# EAGLE board carret (EAGLE 5.06)
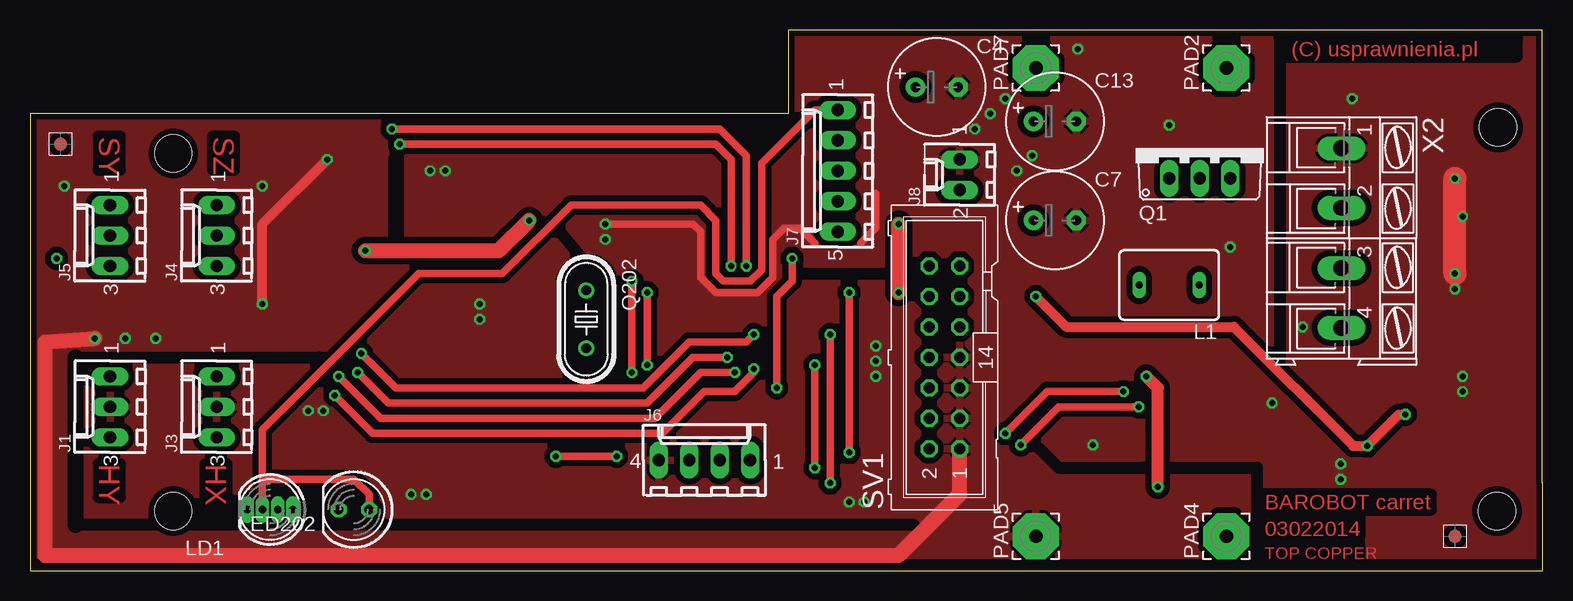
[diagram p0: board, top side]
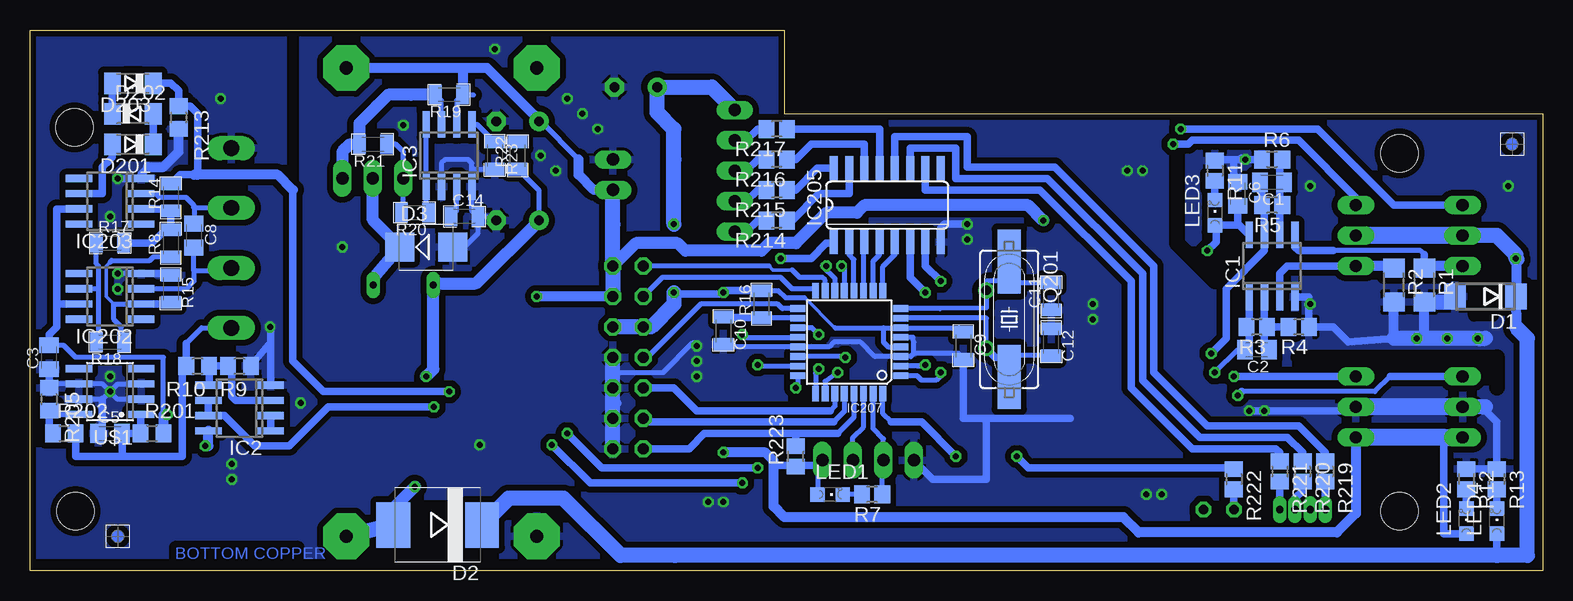
[diagram p1: board, bottom side, seen from below]

Size 126.05 x 45.09 mm. Coordinates in mm from the lower left corner, seen from the top.
Outline: 0,0 126.05,0 126.05,7.3 126.03,7.3 126.03,45.08 63.18,45.09 63.18,38.09 0,38.09 0,0
Copper layers (1*16): Top 0.035mm / dielectric 1.5mm / Bottom 0.035mm
Design rules "default *": minimum track width 10mil, minimum drill 0.5mm, track to track 10mil, track to pad 10mil, pad to pad 8mil, via to via 10mil, smd to smd 8mil, copper to edge 20mil, drill to drill 8mil, minimum pad ring 10mil, minimum via ring 8mil, stop-mask expansion 4mil, vias tented up to drill 0mil, thermal gap 10mil
Holes 3.1 mm at 122.33,36.95 122.25,4.95 11.94,4.95 11.94,34.8
tRestrict: 18 lines
bRestrict: area 4.1,21.3 to 5.7,24.1; area 90.8,2.2 to 93.3,5.4; area 116.8,34.6 to 118.1,41.6; 5 lines

## Footprints (pad centres in the part's own frame; a part is rotated, then mirrored left to right if it is on the bottom)
C0805K = smd 1.3 x 1.6: 1 -1,0; 2 1,0
E3,5-8 = drill 0.813 pad 1.6 round: + -1.778,0 | drill 0.813 pad 1.6 octagon: - 1.778,0
0805 = smd 1.044 x 1.6: 1 -1.127,0; 2 1.127,0
DO214AA = smd 1.8 x 2.2: A 2.55,0; C -2.55,0
SMC = smd 2.8 x 3.8: A 3.7,0; C -3.7,0
SMB = smd 2.4 x 2.4: A 2.2,0; C -2.2,0
SOD80C = smd 1.4 x 1.8: A 1.7,0; C -1.7,0
SO08 = smd 0.6 x 2.2: 1 -1.905,-2.6; 2 -0.635,-2.6; 3 0.635,-2.6; 4 1.905,-2.6; 5 1.905,2.6; 6 0.635,2.6; 7 -0.635,2.6; 8 -1.905,2.6
SOIC8 = smd 0.6 x 2.2: 1 -1.905,-2.6; 2 -0.635,-2.6; 3 0.635,-2.6; 4 1.905,-2.6; 5 1.905,2.6; 6 0.635,2.6; 7 -0.635,2.6; 8 -1.905,2.6
SO16 = smd 0.66 x 2.032: 1 -4.445,-3.073; 2 -3.175,-3.073; 3 -1.905,-3.073; 4 -0.635,-3.073; 5 0.635,-3.073; 6 1.905,-3.073; 7 3.175,-3.073; 8 4.445,-3.073; 9 4.445,3.073; 10 3.175,3.073; 11 1.905,3.073; 12 0.635,3.073; 13 -0.635,3.073; 14 -1.905,3.073; 15 -3.175,3.073; 16 -4.445,3.073
TQFP32-08 = smd 1.27 x 0.559: 1 -4.293,2.8; 2 -4.293,2; 3 -4.293,1.2; 4 -4.293,0.4; 5 -4.293,-0.4; 6 -4.293,-1.2; 7 -4.293,-2; 8 -4.293,-2.8; 17 4.293,-2.8; 18 4.293,-2; 19 4.293,-1.2; 20 4.293,-0.4; 21 4.293,0.4; 22 4.293,1.2; 23 4.293,2; 24 4.293,2.8 | smd 0.559 x 1.27: 9 -2.8,-4.293; 10 -2,-4.293; 11 -1.2,-4.293; 12 -0.4,-4.293; 13 0.4,-4.293; 14 1.2,-4.293; 15 2,-4.293; 16 2.8,-4.293; 25 2.8,4.293; 26 2,4.293; 27 1.2,4.293; 28 0.4,4.293; 29 -0.4,4.293; 30 -1.2,4.293; 31 -2,4.293; 32 -2.8,4.293
6410-03 = drill 1.016 long: 1 2.54,0; 2 0,0; 3 -2.54,0
6410-04 = drill 1.016 long: 1 3.81,0; 2 1.27,0; 3 -1.27,0; 4 -3.81,0
6410-05 = drill 1.016 long: 1 5.08,0; 2 2.54,0; 3 0,0; 4 -2.54,0; 5 -5.08,0
6410-02 = drill 1.016 long: 1 1.27,0; 2 -1.27,0
BS75 = drill 0.6 long: 1 -2.5,0; 2 2.5,0
LED-5-RGB = drill 0.6 pad 1.016 long: 1 1.905,0; 2 0.635,0; 3 -0.635,0; 4 -1.905,0
CHIPLED_0805 = smd 1.2 x 1.2: A 0,-1.05; C 0,1.05
LED5MM = drill 0.813 octagon: A -1.27,0; K 1.27,0
3,81/1,1 = drill 1.118 pad 3.81 octagon: 1 0,0
TO220AV = drill 1.016 long: B -2.54,-2.54; C 0,-2.54; E 2.54,-2.54
HC49UP = smd 5.334 x 1.93: 1 -4.826,0; 2 4.826,0
HC49U-V = drill 0.813 round: 1 -2.413,0; 2 2.413,0
R1206 = smd 1.6 x 1.803: 1 -1.422,0; 2 1.422,0
R0805 = smd 1.3 x 1.5: 1 -0.85,0; 2 0.85,0
R0805' = smd 1.3 x 1.5: 1 -0.95,0; 2 0.95,0
ML14 = drill 0.914 octagon: 1 -7.62,-1.27; 2 -7.62,1.27; 3 -5.08,-1.27; 4 -5.08,1.27; 5 -2.54,-1.27; 6 -2.54,1.27; 7 0,-1.27; 8 0,1.27; 9 2.54,-1.27; 10 2.54,1.27; 11 5.08,-1.27; 12 5.08,1.27; 13 7.62,-1.27; 14 7.62,1.27
AK300/4 = drill 1.321 long: 1 -7.493,0; 2 -2.515,0; 3 2.515,0; 4 7.493,0

## Placement (x,y rotation side)
C1  100n  [C0805K]  22.54,32.38 180 bottom
C2  100n  [C0805K]  23.81,18.41 180 bottom
C3  100n  [C0805K]  124.46,17.78 90 bottom
C4  100u/6V  [E3,5-8]  75.56,40.32 0 top
C5  100n  [C0805K]  119.38,11.43 0 bottom
C6  100n  [C0805K]  25.4,31.43 270 bottom
C7  [E3,5-8]  85.41,29.21 0 top
C8  100n  [C0805K]  112.39,27.94 270 bottom
C9  100n  [0805]  48.26,18.73 270 bottom
C10  100n  [0805]  68.26,20 270 bottom
C11  22p  [0805]  40.96,22.86 90 bottom
C12  22p  [0805]  40.96,19.05 270 bottom
C13  [E3,5-8]  85.41,37.47 0 top
C14  [0805]  89.85,29.53 0 bottom
D1  SS20  [DO214AA]  4.76,22.86 180 bottom
D2  SK36  [SMC]  92.08,3.81 180 bottom
D3  [SMB]  93.03,26.99 0 bottom
D201  1N4148  [SOD80C]  117.47,35.56 180 bottom
D202  1N4148  [SOD80C]  117.47,38.1 0 bottom
D203  1N4148  [SOD80C]  117.47,40.64 180 bottom
IC1  LM358D  [SO08]  22.54,25.4 0 bottom
IC2  LM358D  [SO08]  108.58,13.56 90 bottom
IC3  MC34063AD  [SOIC8]  91.12,34.61 0 bottom
IC202  OP07  [SO08]  119.38,22.86 90 bottom
IC203  OP07  [SO08]  119.38,30.8 90 bottom
IC205  ULN2003  [SO16]  54.61,30.48 0 bottom
IC207  ATMEGA328  [TQFP32-08]  57.78,19.05 180 bottom
J1  WF03-S  [6410-03]  6.67,13.65 90 top
J3  WF03-S  [6410-03]  15.56,13.65 90 top
J4  WF03-S  [6410-03]  15.56,27.94 90 top
J5  WF03-S  [6410-03]  6.67,27.94 90 top
J6  WF04-S  [6410-04]  56.2,9.21 0 top
J7  22-27-2051-05  [6410-05]  67.31,33.34 90 top
J8  WF02-S  [6410-02]  77.47,33.02 90 top
L1  [BS75]  94.93,23.81 180 top
LD1  LRD RGB CA  [LED-5-RGB]  20,5.08 180 top
LED1  LED YEL  [CHIPLED_0805]  59.37,6.35 270 bottom
LED2  LED GRN  [CHIPLED_0805]  6.35,4.13 0 bottom
LED3  LED GRN  [CHIPLED_0805]  27.3,29.84 0 bottom
LED4  LED GRN  [CHIPLED_0805]  3.81,4.13 0 bottom
LED202  LED WHT  [LED5MM]  26.99,5.08 180 top
PAD2  [3,81/1,1]  99.69,41.91 90 top
PAD4  [3,81/1,1]  99.69,2.86 90 top
PAD5  [3,81/1,1]  83.82,2.86 90 top
PAD7  [3,81/1,1]  83.82,41.91 90 top
Q1  TIP42C  [TO220AV]  97.47,35.24 0 top
Q201  16 MHz  [HC49UP]  44.45,20.95 270 bottom
Q202  16 MHz  [HC49U-V]  46.35,20.95 270 top
R1  0R047 1%  [R1206]  9.84,23.81 270 bottom
R2  0R047 1%  [R1206]  12.38,23.81 270 bottom
R3  100k 1%  [R0805]  23.81,20.32 180 bottom
R4  1k 1%  [R0805]  20.32,20.32 180 bottom
R5  100k 1%  [R0805]  22.54,30.48 180 bottom
R6  1k 1%  [R0805]  22.54,34.29 0 bottom
R7  470R  [R0805]  55.88,6.35 180 bottom
R8  8k2  [0805]  114.3,27.3 90 bottom
R9  3k 1%  [R0805']  108.58,17.05 180 bottom
R10  3k 1%  [R0805']  112.08,17.05 180 bottom
R11  470R  [R0805]  27.3,33.34 270 bottom
R12  470R  [R0805]  6.35,7.62 270 bottom
R13  470R  [R0805]  3.81,7.62 270 bottom
R14  330k 1%  [0805]  114.3,31.11 90 bottom
R15  330k 1%  [0805]  114.3,23.5 270 bottom
R16  82R  [0805]  65.09,22.23 90 bottom
R17  1k 1%  [0805]  119.38,27.3 0 bottom
R18  1k 1%  [0805]  119.38,19.05 180 bottom
R19  [0805]  91.12,39.69 180 bottom
R20  [0805]  93.98,29.84 180 bottom
R21  [0805]  97.47,35.56 180 bottom
R22  [0805]  85.41,34.61 90 bottom
R23  [0805]  87.31,34.61 270 bottom
R201  82R  [R0805']  115.89,11.43 0 bottom
R202  3k 1%  [R0805']  123.19,11.43 0 bottom
R205  1k 1%  [R0805']  124.46,14.29 270 bottom
R213  470R  [R0805']  113.67,37.78 270 bottom
R214  TBD  [R0805]  63.82,29.21 180 bottom
R215  TBD  [R0805]  63.82,31.75 180 bottom
R216  TBD  [R0805]  63.82,34.29 180 bottom
R217  TBD  [R0805]  63.82,36.83 180 bottom
R219  TBD  [R0805]  18.1,8.26 270 bottom
R220  TBD  [R0805]  20,8.26 270 bottom
R221  TBD  [R0805]  21.91,8.26 270 bottom
R222  TBD  [R0805]  25.72,7.62 270 bottom
R223  10k  [R0805]  62.23,9.53 90 bottom
SV1  BH14S  [ML14]  76.2,17.78 90 top
U$1  TL431  [SO08]  119.38,14.92 90 bottom
U$2  [FIDUCIAL_G10S]  2.54,35.56 0 top
U$3  [FIDUCIAL_G10S]  2.54,35.56 0 bottom
U$4  [FIDUCIAL_G10S]  118.75,2.86 0 bottom
U$5  [FIDUCIAL_G10S]  118.75,2.86 0 top
X2  [AK300/4]  109.28,27.73 270 top

## Library data of the parts
C1-C8 C13 R9 R10 R201 R202 R205 R213 = rcl
C9-C12 C14 R8 R14-R23 = barobot
D1-D3 D201-D203 = diode
IC1 IC2 IC202 IC203 = linear
IC3 = mc34063
IC205 = uln-udn
IC207 = atmel
J1 J3-J8 = con-molex
L1 = inductor-neosid
LD1 = 0alib2
LED1-LED4 LED202 = led
PAD2 PAD4 PAD5 PAD7 = wirepad
Q1 = transistor-power
Q201 Q202 = crystal
R1-R7 R11-R13 R214-R217 R219-R223 = resistor
SV1 = con-ml
U$1 = 0alib
U$2-U$5 = dicons
X2 = con-ptr500

## Nets
+6V: C7.+ D2.A L1.2 PAD4.1 R22.1
+10V: C5.2 R10.2 R201.1 R202.2 U$1.1 X2.4
+12V: C3.2 C6.2 C13.+ IC1.8 IC2.8 IC3.6 IC202.7 IC203.7 J8.2 LED3.A PAD2.1 R19.1 R201.2 SV1.11 SV1.13
GND: C3.1 C4.- C5.1 C6.1 C7.- C9.2 C10.2 C11.1 C12.1 C13.- C14.2 D1.A D3.A IC1.4 IC2.4 IC3.2 IC3.4 IC202.4 IC203.4 IC205.8 IC207.3 IC207.5 IC207.21 J1.2 J3.2 J6.4 J8.1 PAD5.1 R1.2 R2.2 R4.1 R6.1 R9.1 R11.1 R12.1 R13.1 R15.1 R23.2 R205.1 R213.2 SV1.1 SV1.3 SV1.5 SV1.7 U$1.2 U$1.3 U$1.6 U$1.7 X2.1
N$1: J7.5 R214.2
N$2: J7.4 R215.2
N$3: IC205.16 R215.1
N$4: IC205.15 R214.1
N$5: IC205.14 R216.1
N$6: IC205.10 R221.1
N$7: LD1.1 R219.2
N$8: LD1.3 R220.2
N$9: LD1.4 R221.2
N$10: IC207.29 R223.2 SV1.2
N$11: D1.C D2.C J4.2 J5.2 LED4.A
N$12: IC205.4 IC207.10
N$13: IC205.1 IC207.24
N$14: IC205.2 IC207.12
N$15: IC205.13 R217.1
N$16: IC205.12 R219.1
N$17: IC205.11 R220.1
N$18: IC205.3 IC207.11
N$19: IC205.5 IC207.9
N$20: IC205.6 IC207.2
N$21: IC207.32 R222.1
N$22: IC205.7 IC207.1
N$23: LED202.K R222.2
N$24: IC207.14 J5.1
N$25: IC207.13 J4.1
N$26: IC207.25 J1.1
N$27: C11.2 IC207.8 Q201.1 Q202.1
N$28: IC207.26 J3.1
N$29: IC1.5 J5.3 R1.1
N$30: IC1.3 J4.3 R2.1
N$31: C2.2 IC1.1 IC207.22 R3.2
N$32: J7.3 R216.2
N$33: J7.2 R217.2
N$34: IC207.28 SV1.4
N$35: IC207.15 SV1.14
N$36: LED3.C R11.2
N$37: C1.2 IC1.7 IC207.19 R5.2
N$38: IC207.30 J6.2
N$39: IC207.31 J6.3 R7.1
N$40: LED1.C R7.2
N$41: D203.C IC207.23 R14.2 R213.1
N$42: IC207.16 SV1.12
N$43: R202.1 R205.2 U$1.8
N$44: IC207.17 SV1.8
N$45: IC207.27 SV1.6
N$46: C12.2 IC207.7 Q201.2 Q202.2
N$47: LED4.C R13.2
N$48: C1.1 IC1.6 R5.1 R6.2
N$49: C8.2 IC202.3 X2.3
N$50: C8.1 IC203.3 X2.2
N$51: IC202.2 R8.1 R15.2 R18.1
N$52: IC202.6 R17.1 R18.2
N$53: IC203.2 R8.2 R14.1 R17.2
N$54: D201.A IC203.6
N$55: D201.C D202.A
N$56: D202.C D203.A
N$57: C10.1 IC207.18 R16.1
N$58: IC2.3 IC2.5 R9.2 R10.1
N$59: IC2.6 IC2.7 IC207.20
N$60: IC2.1 IC2.2
N$61: C2.1 IC1.2 R3.1 R4.2
N$63: LED2.C R12.2
N$64: IC3.7 Q1.E R19.2 R21.2
N$65: IC3.1 IC3.8 R20.1
N$66: Q1.B R20.2 R21.1
N$67: C14.1 IC3.3
N$68: IC3.5 R22.2 R23.1
N$71: D3.C L1.1 Q1.C
VCC: C4.+ C9.1 IC207.4 IC207.6 J1.3 J3.3 J6.1 J7.1 LD1.2 LED1.A LED2.A LED202.A R16.2 R223.1 SV1.9 SV1.10

## Tracks (layer width: path | path; a pad name or v marks a point on that pad's centre or on a via)
+6V  (via drill 0.5)
  Top 1.016: v93.03,16.19 93.98,15.24 v93.98,6.99
  Bottom 0.406: L1.2 91.92,23.94 | R22.1 83.63,31.7 C7.+
  Bottom 1.016: 91.92,23.94 88.9,23.94 C7.+ | L1.2 92.43,16.79 v93.03,16.19 | v93.98,6.99 95.78,5.19 D2.A
  Bottom 1.27: D2.A PAD4.1
+10V
  Bottom 0.406: U$1.1 116.84,13.02 | 113.03,18.95 111.74,20.24 X2.4
  Bottom 0.61: 118.11,9.53 113.35,9.53 113.35,16.73 R10.2 113.03,18.95 | R202.2 122.24,9.53 118.11,9.53 | 118.11,9.53 118.38,9.53 C5.2 R201.1 116.84,13.02 U$1.1
+12V  (via drill 0.5)
  Top 0.813: v114.62,13.02 114.08,13.02 v111.44,10.38 110.27,10.38 100.33,20.32 86.36,20.32 v83.82,22.86
  Top 1.27: v41.59,29.21 39.05,26.67 v27.94,26.67
  Bottom 0.406: 114.94,12.06 114.94,17.78 122.24,17.78 123.24,18.78 C3.2 | IC3.6 90.49,39.2 R19.1 89.09,39.69 | 80.33,34.29 83.5,37.47
  Bottom 0.61: IC203.7 123.83,30.16 123.83,22.23 | 123.83,22.23 123.83,20.32 124.46,19.68 C3.2 | 123.83,22.23 IC202.7 | 114.94,12.06 R201.2 | 27.21,28.8 LED3.A 27.21,28.8 | 27.21,28.8 25.4,28.8 25.4,29.21 | 27.21,28.8 27.21,27.4 v27.94,26.67 | 25.4,29.21 25.4,28.95 IC1.8 | 25.4,29.21 C6.2
  Bottom 0.813: 114.94,12.06 114.94,13.02 v114.62,13.02 | v111.44,10.38 111.19,10.38 IC2.8 | SV1.11 v83.82,22.86 | PAD2.1 90.49,41.91 90.17,41.91 | 90.17,41.91 87.95,41.91 83.98,37.94 | 83.5,37.47 83.98,37.94 | 80.33,34.29 80.33,33.02 79.06,31.75 J8.2 | R19.1 90,41.74 90.17,41.91 | C13.+ 83.63,37.59 83.98,37.94
  Bottom 1.016: v41.59,29.21 42.86,30.48 56.52,30.48 57.15,29.84 59.69,29.84 62.23,27.3 64.45,27.3 65.09,26.67 71.44,26.67 72.07,27.3 75.56,27.3 SV1.13
  Bottom 1.27: SV1.11 SV1.13 77.47,28.89 J8.2
GND  (via drill 0.5)
  Top 0.61: 65.41,27.3 64.14,28.57 62.87,28.57 61.91,27.62 61.91,24.45 60.64,23.18 57.15,23.18 55.88,24.45 55.88,28.26 55.24,28.89 v47.94,28.89 | 69.22,27.3 70.48,28.57 70.48,31.43
  Top 0.813: v19.37,22.23 19.37,28.89 v24.77,34.29
  Top 1.27: v5.4,19.37 1.27,19.05 1.27,1.27 72.39,1.27 77.47,6.35 SV1.1
  Top 1.93: v118.75,24.77 v118.75,32.7
  Bottom 0.406: 68.26,18.65 IC207.21 59.45,18.65 59.05,19.05 56.83,19.05 55.63,17.85 IC207.3 52.63,17.85 52.39,18.1 | 68.26,18.65 68.58,18.65 | 52.39,18.1 52.39,19.05 52.47,19.45 IC207.5 | 48.62,18.1 52.39,18.1 | 70.8,19 73.3,16.51 77.47,16.51 | R205.1 124.14,15.56 U$1.6 120.02,15.56 v119.38,14.92 | U$1.7 120.02,14.29 v119.38,14.92 | U$1.2 118.75,14.29 v119.38,14.92 | U$1.3 118.75,15.56 119.22,15.08 | IC202.4 v118.75,24.77 | 68.26,18.65 C10.2 | 89.22,33.66 89.22,33.97 89.53,34.29 91.44,34.29 91.76,33.97 IC3.2 | 89.22,33.66 IC3.4 89.22,30.02 C14.2 | R23.2 89.04,33.48 89.22,33.66 | C14.2 88.08,29.53 C7.- | D3.A 89.85,26.99 88.9,27.94 88.72,28.11 C14.2
  Bottom 0.61: 48.26,12.7 C9.2 | 5.08,13.65 3.81,12.38 R13.1 R12.1 | 12.38,19.37 16.19,19.05 17.46,20.32 R4.1 19.47,22.23 19.47,22.8 IC1.4 | v47.94,28.89 49.85,28.89 50.16,28.57 IC205.8 | 25.08,34.29 25.72,34.29 | v24.77,34.29 R6.1 | 25.72,34.29 25.72,33.02 C6.1 | 25.72,34.29 27.2,34.29 | IC202.4 114.3,24.77 R15.1 | R213.2 113.67,37.15 | 105.73,15.46 IC2.4 105.98,19.05 | C5.1 120.02,11.43 120.02,14.29 | v118.75,32.7 IC203.4 | IC203.4 116.2,32.7 | R205.1 C3.1 | v119.38,14.92 119.22,15.08 | 105.98,19.05 R9.1 | 105.98,19.05 105.98,20.26 v106.05,20.32 | 39.37,12.7 48.26,12.7 | 48.26,12.7 46.35,12.7 46.35,7.62 50.8,7.62 J6.4 | v24.45,13.34 15.88,13.34 J3.2 | 116.2,33.66 116.78,33.08 IC203.4
  Bottom 0.813: 12.38,19.37 R2.2 | 9.84,19.37 R1.2 | 77.47,13.97 77.15,13.97 | v24.77,34.29 25.08,34.29 | 19.47,22.23 v19.37,22.23 | R213.2 113.67,34.92 114.62,33.97 114.94,33.66 116.2,33.66
  Bottom 1.27: 4.76,13.65 5.08,13.65 J1.2 | 4.76,19.37 v5.4,19.37 9.84,19.37 12.38,19.37 | D1.A 7.86,22.39 R1.2 | SV1.1 SV1.3 77.47,13.97 SV1.5 77.47,16.51 SV1.7
  Bottom 1.422: J1.2 J3.2
  other vias: 7.94,19.37 10.48,19.37 19.37,32.07 109.22,8.89 110.17,39.37 23.18,13.34 31.75,6.35 33.02,6.35 109.22,7.62 119.38,29.53 118.75,23.5 119.38,16.19 81.28,39.37 70.48,18.73 70.48,17.46 70.48,16.19 33.34,33.34 34.61,33.34 2.86,32.07 68.26,5.71 69.53,5.71 83.5,34.61 82.23,33.34 80.01,38.1 78.74,36.83 37.47,22.23 37.47,20.95 47.94,27.62 103.5,13.97 88.58,10.48 100.01,26.99 94.93,37.15 87.31,43.5
  pour Top (isolate 0.508, rank 3): 0,38.1 63.5,38.1 63.5,44.45 125.73,44.45 125.73,1.27 0,1.27
  pour Bottom (isolate 0.508): 0,38.1 63.5,38.1 63.5,44.45 125.73,44.45 125.73,1.27 0,1.27
N$1
  Bottom 0.61: R214.2 65.41,29.21 66.36,28.26 J7.5
N$2
  Bottom 0.61: R215.2 65.41,31.75 66.36,30.8 J7.4
N$3
  Bottom 0.61: R215.1 62.23,31.75 60.43,33.55 IC205.16
N$4
  Bottom 0.61: IC205.15 57.78,31.43 60.33,31.43 62.55,29.21 R214.1
N$5
  Bottom 0.61: R216.1 62.23,34.29 60.96,35.56 56.52,35.56 IC205.14
N$6
  Bottom 0.61: IC205.10 51.44,31.75 41.91,31.75 34.29,24.13 34.29,15.24 29.21,10.16 22.23,10.16 21.91,9.84 R221.1
N$7
  Bottom 0.61: LD1.1 R219.2
N$8
  Bottom 0.61: LD1.3 20.64,6.03 20,6.67 R220.2
N$9
  Bottom 0.61: LD1.4 R221.2
N$10
  Bottom 0.406: IC207.29 57.38,12.78 58.74,11.43
  Bottom 0.61: 58.74,11.43 62.23,11.43 | 62.23,11.43 69.85,11.43 71.12,10.16 SV1.2 | 62.23,11.43 R223.2
N$11  (via drill 0.5)
  Bottom 0.61: 3.81,1.27 LED4.A
  Bottom 0.813: 2.14,20.23 D1.C | 2.14,23.18 2.14,25.95
  Bottom 1.27: J5.2 3.81,27.94 2.22,26.35 v2.22,26.04 2.14,25.95 | D1.C 2.14,23.18 | 2.14,20.23 1.27,19.37 1.27,1.27 3.81,1.27 72.31,1.27 76.83,1.27 81.6,6.03 86.15,6.03 D2.C
  Bottom 1.422: J5.2 J4.2
N$12
  Bottom 0.406: IC207.10 55.78,25.81 55.24,26.35 IC205.4
N$13  (via drill 0.5)
  Top 0.61: v63.5,26.04 63.5,24.13 62.23,22.86 v62.23,15.24
  Bottom 0.406: IC207.24 62.08,15.39 v62.23,15.24 | 59.16,27.3 IC205.1
  Bottom 0.61: 59.16,27.3 59.69,27.3 60.96,26.04 v63.5,26.04
N$14
  Bottom 0.406: IC207.12 57.38,25.95 57.78,26.35 IC205.2
N$15
  Bottom 0.61: IC205.13 55.24,36.51 55.24,36.83 58.1,36.83 R217.1
N$16
  Bottom 0.61: IC205.12 53.98,36.2 47.94,36.2 47.94,33.66 43.81,33.66 | 43.81,33.66 43.18,33.66 | 43.81,33.66 40.64,33.66 32.38,25.4 32.38,16.51 27.94,12.06 20.32,12.06 18.1,9.84 R219.1
N$17
  Bottom 0.61: IC205.11 52.7,35.24 48.9,35.24 48.9,32.7 41.27,32.7 33.34,24.77 33.34,15.88 28.57,11.11 21.27,11.11 20,9.84 R220.1
N$18
  Bottom 0.406: IC207.11 56.59,27.34 IC205.3
N$19
  Bottom 0.406: IC207.9 54.98,25.34 53.98,26.35 IC205.5
N$20  (via drill 0.5)
  Top 0.61: v51.44,17.14 v51.44,23.18
  Bottom 0.406: 52.07,17.05 IC207.2 | 52.07,17.05 51.85,17.05 | v51.44,17.14 51.44,17.05 52.07,17.05
  Bottom 0.61: v51.44,23.18 52.7,24.45 IC205.6
N$21  (via drill 0.5)
  Top 0.61: v43.81,9.53 v48.9,9.53
  Bottom 0.406: IC207.32 54.98,13.07 54.29,12.38
  Bottom 0.61: R222.1 25.82,8.57 42.86,8.57 v43.81,9.53 | 54.29,12.38 51.75,12.38 v48.9,9.53
N$22  (via drill 0.5)
  Top 0.61: v50.16,16.51 v50.16,24.13
  Bottom 0.406: v50.16,16.51 50.16,16.25 50.54,15.88 51.75,15.88 52.13,16.25 IC207.1
  Bottom 0.61: v50.16,24.13 51.44,25.4 IC205.7
N$23
  Bottom 0.61: R222.2 LED202.K
N$24  (via drill 0.5)
  Top 0.61: v30.16,36.83 57.47,36.83 59.69,34.61 v59.69,25.4
  Bottom 0.406: IC207.14 58.98,24.38 60.01,25.4 v59.69,25.4
  Bottom 0.61: v30.16,36.83 18.73,36.83 12.38,30.48 J5.1
N$25  (via drill 0.5)
  Top 0.61: v58.42,25.4 58.42,34.29 57.15,35.56 v30.8,35.56
  Bottom 0.406: IC207.13 58.19,25.16 v58.42,25.4
  Bottom 0.61: v30.8,35.56 29.53,35.56 29.21,35.88 20.32,35.88 15.56,31.11 J4.1
N$26  (via drill 0.5)
  Top 0.61: v25.4,14.61 28.57,11.43 52.7,11.43 56.2,14.92 58.74,14.92 60.33,16.51 v60.33,16.83
  Bottom 0.406: IC207.25 60.59,16.45 v60.33,16.83 | 12.7,16.19 13.97,14.92 25.08,14.92
  Bottom 0.61: J1.1 12.7,16.19 | 25.08,14.92 v25.4,14.61
N$27
  Bottom 0.406: IC207.8 50.22,21.85 46.35,21.91 Q202.1 46.35,24.13 44.45,24.13 44.31,23.99 C11.2
  Bottom 0.61: 44.45,23.86 44.45,24.13 Q201.1
N$28  (via drill 0.5)
  Top 0.61: v58.74,16.51 55.88,16.51 52.07,12.7 29.21,12.7 v25.72,16.19
  Bottom 0.406: IC207.26 59.78,15.78 v58.74,16.51
  Bottom 0.61: J3.1 v25.72,16.19
N$29
  Bottom 0.406: 9.84,26.35 10.16,26.67 17.46,26.67
  Bottom 0.61: 9.21,25.4 R1.1 9.84,26.35 | 17.46,26.67 20.32,26.67 20.64,26.99 IC1.5
  Bottom 0.813: J5.3 9.21,25.4
N$30
  Bottom 0.61: R2.1 13.18,25.4 | J4.3 21.27,25.4 21.91,24.77 IC1.3
  Bottom 0.813: 13.18,25.4 J4.3
N$31  (via drill 0.5)
  Top 0.61: v58.1,17.78 55.24,17.78 51.44,13.97 29.84,13.97 v27.3,16.51
  Bottom 0.406: IC207.22 58.17,17.85 v58.1,17.78 | v27.3,16.51 25.4,18.41 C2.2
  Bottom 0.61: C2.2 24.45,18.41 24.45,20.32 | 24.45,20.32 IC1.1 | 24.45,20.32 R3.2
N$32
  Bottom 0.61: R216.2 65.41,34.29 66.36,33.34 J7.3
N$33
  Bottom 0.61: R217.2 65.41,36.83 66.36,35.88 J7.2
N$34
  Bottom 0.406: IC207.28 58.19,13.25 59.05,12.38
  Bottom 0.61: 59.05,12.38 70.48,12.38 74.93,12.38 SV1.4
N$35
  Bottom 0.305: 62.55,25.08 64.14,25.08 64.45,25.4
  Bottom 0.406: 74.61,25.4 SV1.14 64.45,25.4 | IC207.15 59.78,24.23 60.01,24.45 61.91,24.45 62.55,25.08
N$36
  Bottom 0.61: LED3.C R11.2
N$37  (via drill 0.5)
  Top 0.61: v27.62,18.1 30.48,15.24 51.12,15.24 54.93,19.05 59.69,19.05 v60.33,19.68
  Bottom 0.406: IC207.19 60.89,20.25 v60.33,19.68
  Bottom 0.61: 23.54,32.87 C1.2 23.39,32.38 R5.2 23.18,30.48 IC1.7 23.18,26.67 26.35,23.5 26.35,19.37 v27.62,18.1
N$38
  Bottom 0.406: IC207.30 56.59,11.99 57.47,11.11 J6.2
N$39
  Bottom 0.406: 54.93,10.16 J6.3 55.03,9.21 R7.1 | 54.93,10.16 54.93,10.48 | IC207.31 55.78,11.84 54.93,10.98 54.93,10.16
N$40
  Bottom 0.406: R7.2 LED1.C
N$41  (via drill 0.5)
  Top 0.61: v65.41,8.57 v65.41,17.14 | v81.28,11.43 84.77,14.92 v91.12,14.92
  Bottom 0.406: IC207.23 64.99,17.05 v65.41,17.14
  Bottom 0.61: 104.14,31.75 104.14,17.46 101.6,14.92 v91.12,14.92 | 112.39,33.02 113.53,33.02 R14.2 | D203.C 114.3,40.64 113.67,40.01 R213.1 112.71,38.73 112.08,38.1 112.08,33.02 | v65.41,8.57 78.42,8.57 v81.28,11.43
  Bottom 0.813: 104.14,31.75 105.41,33.02 112.08,33.02 112.39,33.02
N$42
  Bottom 0.406: SV1.12 73.34,24.45 63.5,24.45 62.55,23.5 60.74,23.5 IC207.16
N$43
  Bottom 0.406: R205.2 124.14,13.02 U$1.8 121.92,13.02
  Bottom 0.61: R202.1 124.46,11.43 R205.2
N$44
  Bottom 0.406: SV1.8 74.61,17.78 70.17,22.23 63.72,22.23 63.35,21.85 IC207.17
N$45
  Bottom 0.406: IC207.27 58.98,13.72 59.37,13.34
  Bottom 0.61: 59.37,13.34 70.48,13.34 72.39,15.24 SV1.6
N$46
  Bottom 0.406: Q202.2 46.35,21.05 IC207.7 | C12.2 44.31,17.92 44.45,17.78
  Bottom 0.61: 44.45,17.78 44.45,18.05 | 44.45,17.78 Q201.2 | Q202.2 45.59,17.78 44.45,17.78
N$47
  Bottom 0.61: R13.2 LED4.C
N$48
  Bottom 0.61: IC1.6 21.91,30.48 | 21.91,30.48 21.91,32.38 | 21.91,32.38 21.91,34.29 R6.2 | 21.91,32.38 C1.1 | 21.91,30.48 R5.1
N$49
  Bottom 0.406: IC202.3 113.03,23.5 112.39,24.13 112.39,25 | 112.39,26.99 C8.2 112.39,25 | X2.3 109.28,25 112.39,25
  Bottom 0.61: C8.2 112.39,27.3
N$50
  Bottom 0.406: IC203.3 115.57,31.43 115.25,31.11 113.03,31.11 112.39,30.48 112.39,30.25 112,30.25 | C8.1 112.35,29.26 112.35,30.25 112,30.25 | X2.2 112,30.25
N$51
  Bottom 0.305: 119.38,25.72 119.69,25.4 119.7,25.4 119.7,22.86 119.06,22.23
  Bottom 0.406: IC202.2 119.06,22.23 119.06,20.95 118.43,20.32 118.43,19.23 R18.1 | 119.38,25.72 119.24,25.86 116.06,25.86 115.75,26.18 R8.1
  Bottom 0.61: IC202.2 114.62,22.23 114.48,22.37 R15.2
N$52
  Bottom 0.406: 120.33,23.5 120.33,25.4 120.51,25.57 R17.1 | 120.33,23.5 120.33,19.05 R18.2 | 120.33,23.5 IC202.6
N$53
  Bottom 0.61: IC203.2 114.47,30.16 R14.1 R8.2 115.08,28.11 115.89,27.3 R17.2
N$54
  Bottom 0.61: IC203.6 120.02,31.43 120.02,33.02 120.02,33.66 119.38,34.29 119.17,34.49 D201.A 119.38,35.35
N$55
  Bottom 0.61: D201.C D202.A
N$56
  Bottom 0.61: D202.C D203.A
N$57
  Bottom 0.406: IC207.18 64.76,21.05 | 68.17,21.1 68.23,21.1 C10.1
  Bottom 0.61: 68.17,21.1 R16.1 64.81,21.1 64.76,21.05
N$58
  Bottom 0.61: 111.44,15.46 IC2.5 111.13,15.46 R10.1 | R10.1 R9.2 109.22,16.73 109.22,14.51 108.9,14.19 IC2.3 | R10.1 111.44,17.05
N$59  (via drill 0.5)
  Top 0.61: v66.67,7.3 v66.67,19.68 | v82.55,10.48 85.72,13.65 v92.39,13.65
  Bottom 0.406: IC207.20 66.44,19.45 v66.67,19.68
  Bottom 0.61: IC2.6 IC2.7 109.86,12.92 107.31,10.38 104.46,10.38 101.19,13.65 100.65,13.65 v92.39,13.65 | v66.67,7.3 79.38,7.3 v82.55,10.48
N$60
  Bottom 0.61: IC2.1 IC2.2
N$61
  Bottom 0.61: 23.18,20.32 23.18,18.41 C2.1 | 23.18,20.32 IC1.2 | 23.18,20.32 R3.1 R4.2
N$63
  Bottom 0.61: R12.2 LED2.C
N$64
  Bottom 0.406: IC3.7 91.76,39.2 R19.2 | R21.2 99.38,35.56
  Bottom 1.016: 99.38,35.56 100.01,34.92 Q1.E | R19.2 94.3,39.69 96.2,39.69 97.16,38.73 98.6,37.29 R21.2
N$65
  Bottom 0.406: IC3.8 IC3.1 93.03,29.99 R20.1
N$66
  Bottom 0.406: R21.1 95.57,35.56 94.93,34.92 Q1.B 94.93,30.02 R20.2
N$67
  Bottom 0.406: IC3.3 90.49,30.02 C14.1
N$68
  Bottom 0.406: R22.2 R23.1 88.78,37.21 IC3.5
N$71
  Bottom 0.406: L1.1 97.13,24.75
  Bottom 1.016: 97.13,24.75 D3.C 97.47,29.23 Q1.C
VCC  (via drill 0.5)
  Top 0.61: v68.26,9.84 v68.26,23.18 | 19.37,7.62 LD1.2 | 19.37,7.62 26.99,7.62 28.26,6.35 LED202.A | 19.37,7.62 19.37,11.75 32.38,24.77 39.37,24.77 45.09,30.48 55.88,30.48 57.15,29.21 57.15,24.77 57.78,24.13 60.01,24.13 60.96,25.08 60.96,33.97 65.41,38.42 J7.1
  Top 1.27: v72.39,23.18 v72.39,28.89
  Bottom 0.305: 61.49,22.76 58.98,20.25
  Bottom 0.406: 54.93,20.25 IC207.6 48.65,20.25 C9.1 | 58.98,20.25 54.93,20.25 | LED1.A 60.42,8.79 J6.1 | IC207.4 54.53,18.65 54.93,19.05 54.93,20.25 | 61.49,22.76 63.08,22.76 63.67,23.35 R16.2
  Bottom 0.61: 62.23,8.79 60.42,8.79 | 62.23,8.79 R223.1 | LED2.A 8.26,3.08 8.26,11.11 | R16.2 68.09,23.35 v68.26,23.18 68.26,23.07 72.29,23.07 v72.39,23.18 | 62.23,8.79 63.99,8.79 64.09,8.89
  Bottom 0.813: J3.3 15.56,4.76 17.14,3.17 33.66,3.17 34.92,4.45 63.18,4.45 64.09,5.35 64.09,8.89 64.09,9.16 64.77,9.84 v68.26,9.84
  Bottom 1.27: SV1.9 SV1.10 74.3,20.32 72.39,22.23 v72.39,23.18 | v72.39,28.89 72.39,34.29 72.39,36.83 73.79,38.23 C4.+ 69.22,40.32 J7.1
  Bottom 1.422: J1.3 8.26,11.11 J3.3

## Text on the board
Top: (C) usprawnienia.pl | SY | SZ | HY | HX | BAROBOT carret | 03022014 | TOP COPPER
Bottom: BOTTOM COPPER
HelpDim: PRZETWORNICA